# Altium PCB Altium_TPS63070 DCDC_PCB1.pcbdoc
Units mil, origin at the board's own origin, x right, y up, seen from the top; angles counter-clockwise.
Board outline 2085 x 1305 mil, 2 copper layers (Top Layer, Bottom Layer); 17 components, 10 nets, 49 pads, 64 vias.
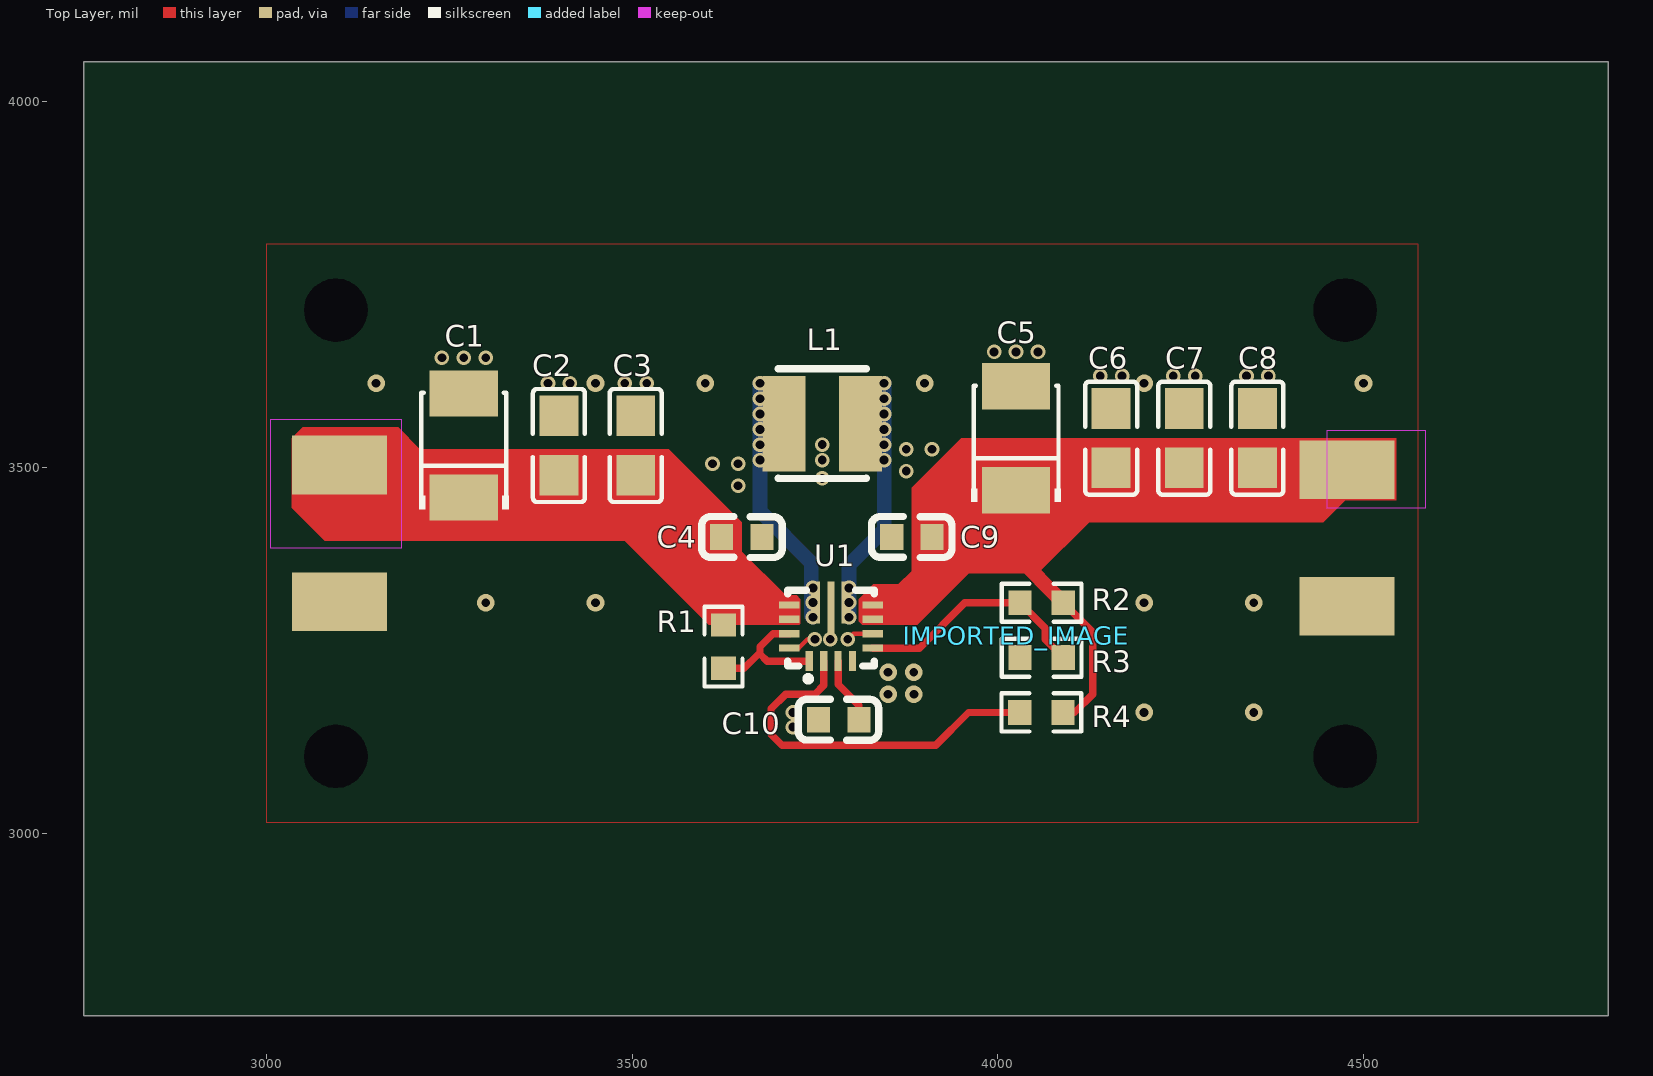
[diagram p0: Top Layer view]
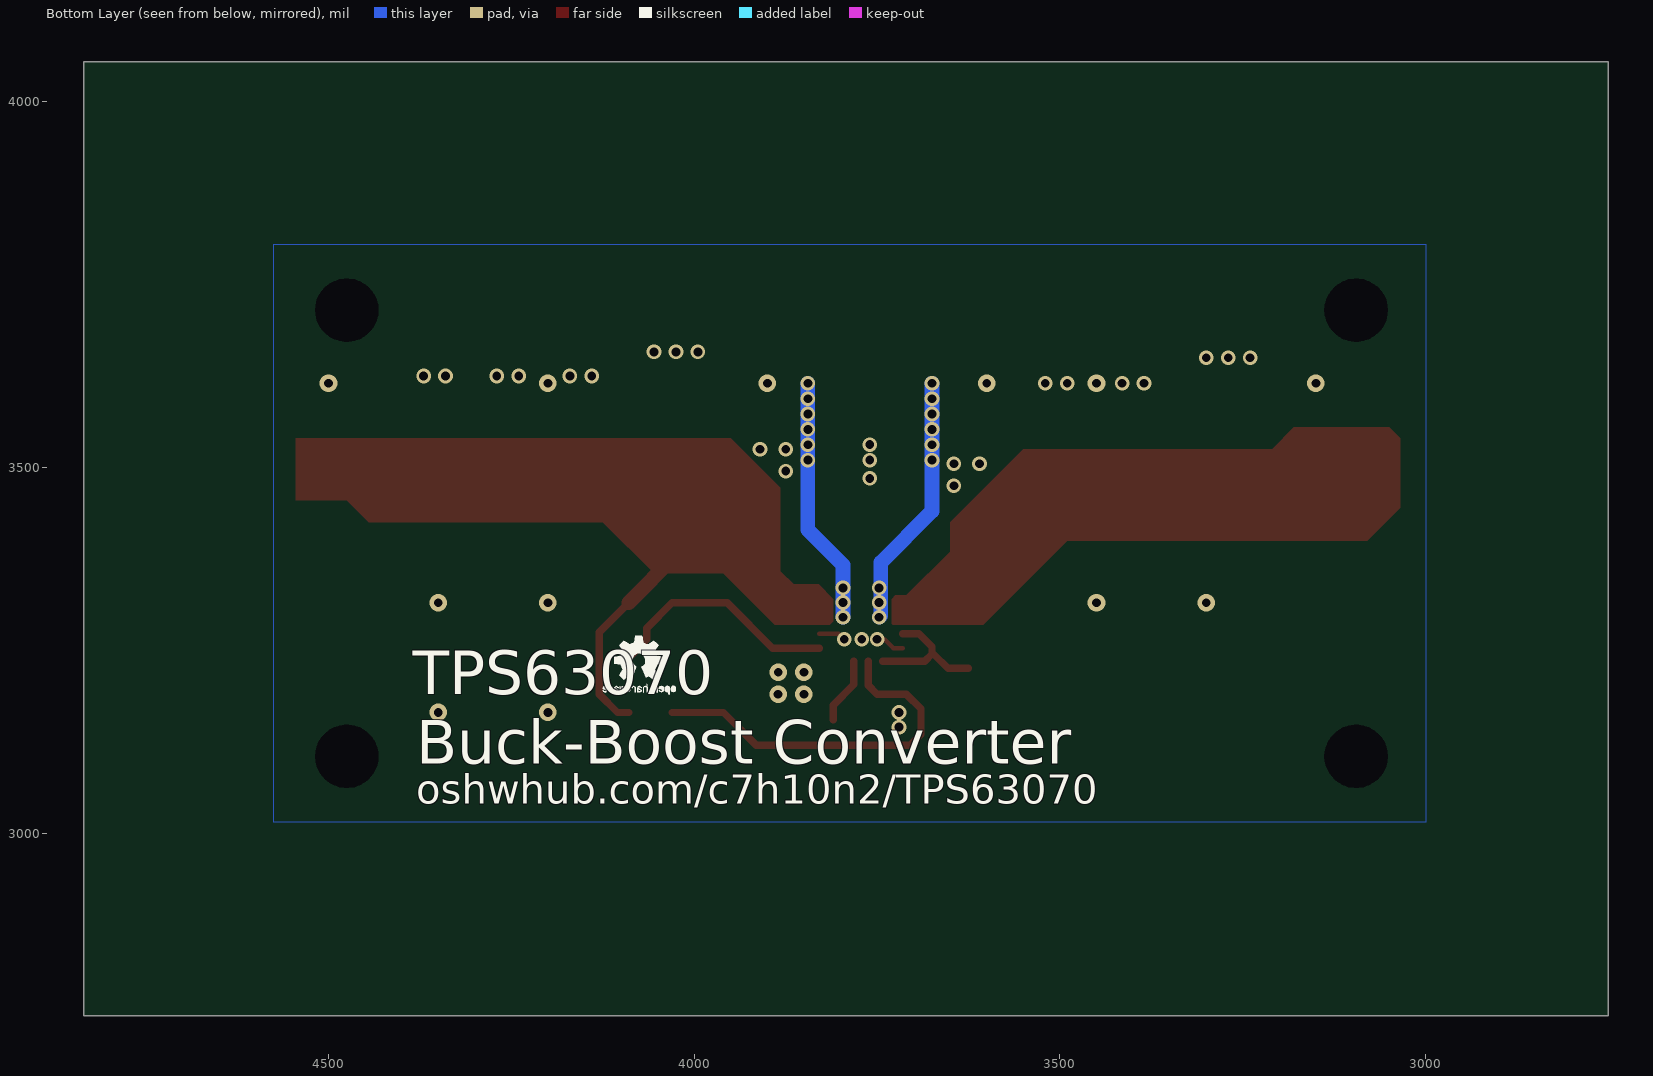
[diagram p1: Bottom Layer view, seen from below]

## Layer stack, top to bottom
Top Solder: solder mask 0.4, Solder Resist, Dk 3.5
Top Layer: signal copper 1.4
Dielectric 1: dielectric 12.6, FR-4, Dk 4.8
Bottom Layer: signal copper 1.4
Bottom Solder: solder mask 0.4, Solder Resist, Dk 3.5

## Board outline
4835,2750 2750,2750 2750,4055 4835,4055
cut-out: 3138.31,3715 ccw(c3095,3715) 3051.69,3715 ccw(c3095,3715)
cut-out: 3138.31,3105 ccw(c3095,3105) 3051.69,3105 ccw(c3095,3105)
cut-out: 4518.31,3105 ccw(c4475,3105) 4431.69,3105 ccw(c4475,3105)
cut-out: 4518.31,3715 ccw(c4475,3715) 4431.69,3715 ccw(c4475,3715)

## Components (designator, comment, footprint, x,y, rotation, side; value= is the part's Value field where it differs from the comment)
C1 "TAJB107K006RNJ" CAP-SMD_L3.5-W2.8 3270,3530 r270 top
C2 "CAP_0805" C0805 3400,3530 r270 top
C3 "CAP_0805" C0805 3505,3530 r270 top
C4 "CAP_0603" C0603 3650,3405 r180 top
C5 "TAJB107K006RNJ" CAP-SMD_L3.5-W2.8 4025,3540 r270 top
C6 "CAP_0805" C0805 4155,3540 r270 top
C7 "CAP_0805" C0805 4255,3540 r270 top
C8 "CAP_0805" C0805 4355,3540 r270 top
C9 "CAP_0603" C0603 3882.59,3404.79 r0 top
C10 "CAP_0603" C0603 3782.44,3155 r0 top
IMPORTED_IMAGE "IMPORTED_IMAGE" IMPORTED_IMAGE 4025,3270 r0 top
L1 "SWPA3015S1R5NT" IND-SMD_L3.0-W3.0 3760,3560 r180 top
R1 "Res_0603" R0603 3625,3255 r90 top
R2 "Res_0603" R0603 4060,3315 r0 top
R3 "Res_0603" R0603 4060,3240 r180 top
R4 "Res_0603" R0603 4059.66,3165 r180 top
U1 "TPS63070RNMR" VQFN-HR-15_L3.0-W2.5-P0.50-BL_TPS63070RNMR 3771.91,3275.25 r0 top

## Footprints (in the part's own frame and the unit in brackets; to place one, negate y for a bottom-side part, rotate by r counter-clockwise, add the part's x,y. Pads: shape width x height; smd on the part's side, far side on the other; paste and mask are expansions set on the pad)
C0603 [mm]
  rect 0.8x0.9 smd: 1(-0.7,0) 2(0.7,0)
  silkscreen extent -1.41,-0.71 1.39,0.72
C0805 [mm]
  rect 1.41x1.35 smd: 1(-1.03,0) 2(1.03,0)
  silkscreen extent -1.96,-0.9 1.96,0.9
CAP-SMD_L3.5-W2.8 [mil]
  rect 63.3x93.5 smd: 1(71,0) 2(-71,0)
  silkscreen extent -72,-61 87,61
IMPORTED_IMAGE [mil]
IND-SMD_L3.0-W3.0 [mil]
  rect 59.1x130.7 smd: 1(52.3,0) 2(-52.3,0)
  silkscreen extent -60,-75 60,75
R0603 [mil]
  rect 31.75x34.02 smd: 1(-29.66,0) 2(29.66,0)
  silkscreen extent -55,-26 55,26
VQFN-HR-15_L3.0-W2.5-P0.50-BL_TPS63070RNMR [mm]
  rect 0.25x0.7 smd: 1(-0.75,-1.016) 2(-0.25,-1.016) 3(0.25,-1.016) 4(0.75,-1.016)
  rect 0.7x0.25 smd: 5(1.45,-0.566) 6(1.45,-0.066) 7(1.45,0.434) 8(1.45,0.934) 12(-1.45,0.434) 13(-1.45,0.934) 14(-1.45,-0.066) 15(-1.45,-0.566)
  rect 0.25x1.45 smd: 9(0.5,1.016) 11(-0.5,1.016)
  rect 0.25x1.85 smd: 10(0,0.816)
  silkscreen extent -1.5,-1.73 1.5,1.44

## Free pads (board coordinates)
  rect 130x80 smd: 1(3100,3316.67) 2(3100,3503.33) 2(4477.75,3310.03) 3(4477.75,3496.69)

## Via types
v1: diameter 20, hole 12.01, Top Layer to Bottom Layer, 48 vias
v2: diameter 24, hole 12, Top Layer to Bottom Layer, 16 vias

## Nets (pads, with @x,y where several pads share a name; then routed paths per layer and width w, separated by ;. In a path a pad name is that pad's centre, name@x,y a point inside that pad or via, vN(x,y) a via of type N, cw(c..) or ccw(c..) an arc to the next point about the centre after c; other vN are vias at no path point)
$1N926: C10.2 U1.3 | length 91.9
  Top Layer w10: U1.3 3781.74,3203.26 3810,3175 C10.2
$1N927: R4.2 U1.2 | length 518.4
  Top Layer w10: U1.2 3762.05,3202.05 3750,3190 3710,3190 3690,3170 3690,3135 3705,3120 3915,3120 3960,3165 R4.2
$1N932: R1.1 U1.1 U1.14 | length 187.8
  Top Layer w10: R1.1 3653.09,3225.34 3672.75,3245 ; U1.14 3692.67,3272.67 3675,3255 3675,3247.25 3672.75,3245 ; U1.1 3742.13,3235 3685,3235 3675,3245 3672.75,3245
$1N934: L1.1 U1.11 | length 349.6
  Bottom Layer w20: v1(3675,3615) v1(3675,3594) v1(3675,3573) v1(3675,3552) v1(3675,3531) v1(3675,3510) 3675,3440 3745,3370 3745,3297.48 v1(3747.22,3295.26)
  other v1: 3747.22,3315.26 3747.22,3335.26
$1N935: L1.2 U1.9 | length 339.6
  Bottom Layer w20: v1(3796.59,3295.26) v1(3796.59,3315.26) v1(3796.59,3335.26) 3796.59,3366.59 3844.63,3414.63 v1(3844.63,3510) v1(3844.63,3531) v1(3844.63,3552) v1(3844.63,3573) v1(3844.63,3594) v1(3844.63,3615)
FB: R2.1 R3.1 U1.5 | length 326.6
  Top Layer w10: U1.5 3892.97,3252.97 3955,3315 R2.1 4065,3280.34 4065,3264.66 R3.1
GND: C1.2 C2.1 C3.1 C4.1 C5.2 C6.1 C7.1 C8.1 C9.1 C10.1 pad.1 pad.2@4477.75,3310.03 R3.2 U1.4 U1.6 U1.10 U1.15 | length 77.3
  Top Layer w6: U1.15 3727.98,3252.98 3740,3265 v1(3750,3265) ; v1(3795,3265) 3802.65,3272.65 U1.6
  other v1: 3720,3145 3720,3165 3771.01,3265 3645,3475 3760,3485 3875,3495 3610,3505 3645,3505 3760,3510 3875,3525 3910,3525 3760,3531.23 3385,3615 3415,3615 3490,3615 3520,3615 4140,3625 4170,3625 4240,3625 4270,3625 4340,3625 4370,3625 3240,3650 3270,3650 3300,3650 3995,3657.92 4025,3657.92 4055,3657.92
  other v2: 4200,3165 4350,3165 3850,3190 3885.35,3190 3850,3220 3885,3220 3300,3315 3450,3315 4200,3315 4350,3315 3150,3615 3450,3615 3600,3615 3900,3615 4200,3615 4500,3615
VBUS: C1.1 C2.2 C3.2 C4.2 pad.2@3100,3503.33 R1.2 U1.12 U1.13
VOUT: C5.1 C6.2 C7.2 C8.2 C9.2 pad.3 R2.2 R4.1 U1.7 U1.8 | length 373.5
  Top Layer w10: R4.1 4105,3165 4130,3190 4130,3274.66 R2.2
  Top Layer w20: C5.1 4025,3379.66 R2.2
"": 

## Polygon pours and split planes (outlines as drawn)
GND on Top Layer (solid, remove dead copper): 3000,3015 4575,3015 4575,3805 3000,3805
GND on Bottom Layer (solid, remove dead copper, pour order 1): 3000,3015 4575,3015 4575,3805 3000,3805

## Keep-outs
Top Layer:
  region: 3005,3390 3185,3390 3185,3565 3005,3565
  region: 4450,3445 4585,3445 4585,3550 4450,3550

## Other copper
Top Layer:
  region net VBUS: 3035,3540 3035,3445 3080,3400 3490,3400 3605,3285 3728.75,3285 3730.04,3286.3 3730.04,3319.96 3725,3325 3710,3325 3650,3385 3650,3425 3550,3525 3210,3525 3180,3555 3050,3555
  region net VOUT: 4545,3455 4475,3455 4445,3425 4125,3425 4055,3355 3960,3355 3890,3285 3815,3285 3810,3290 3810,3320 3830,3340 3864.11,3340 3882.28,3358.17 3882.28,3472.28 3950,3540 4545,3540

## Silkscreen, mask and mechanical layers (free items; w line width, h text height)
Bottom Overlay:
  text "TPS63070" at 4385,3190 h60
  text "Buck-Boost Converter" at 4380,3095 h60
  text "oshwhub.com/c7h10n2/TPS63070" at 4380,3040 h40
Mechanical 1:
  circle w1: c3095,3715 r43.31
  circle w1: c3095,3105 r43.31
  circle w1: c4475,3105 r43.31
  circle w1: c4475,3715 r43.31
  lines w10: 3000,3017.6 4574.8,3017.6 4574.8,3805 3000,3805 3000,3017.6